# Altium PCB Signal_Integrity_2L.PcbDoc
Units mm, origin at the board's own origin, x right, y up, seen from the top; angles counter-clockwise.
Board outline 110 x 120 mm, 2 copper layers (Top Layer 1, Bottom Layer 1), stack 1.6 mm thick; 18 components, 16 nets, 78 pads, 1329 vias.
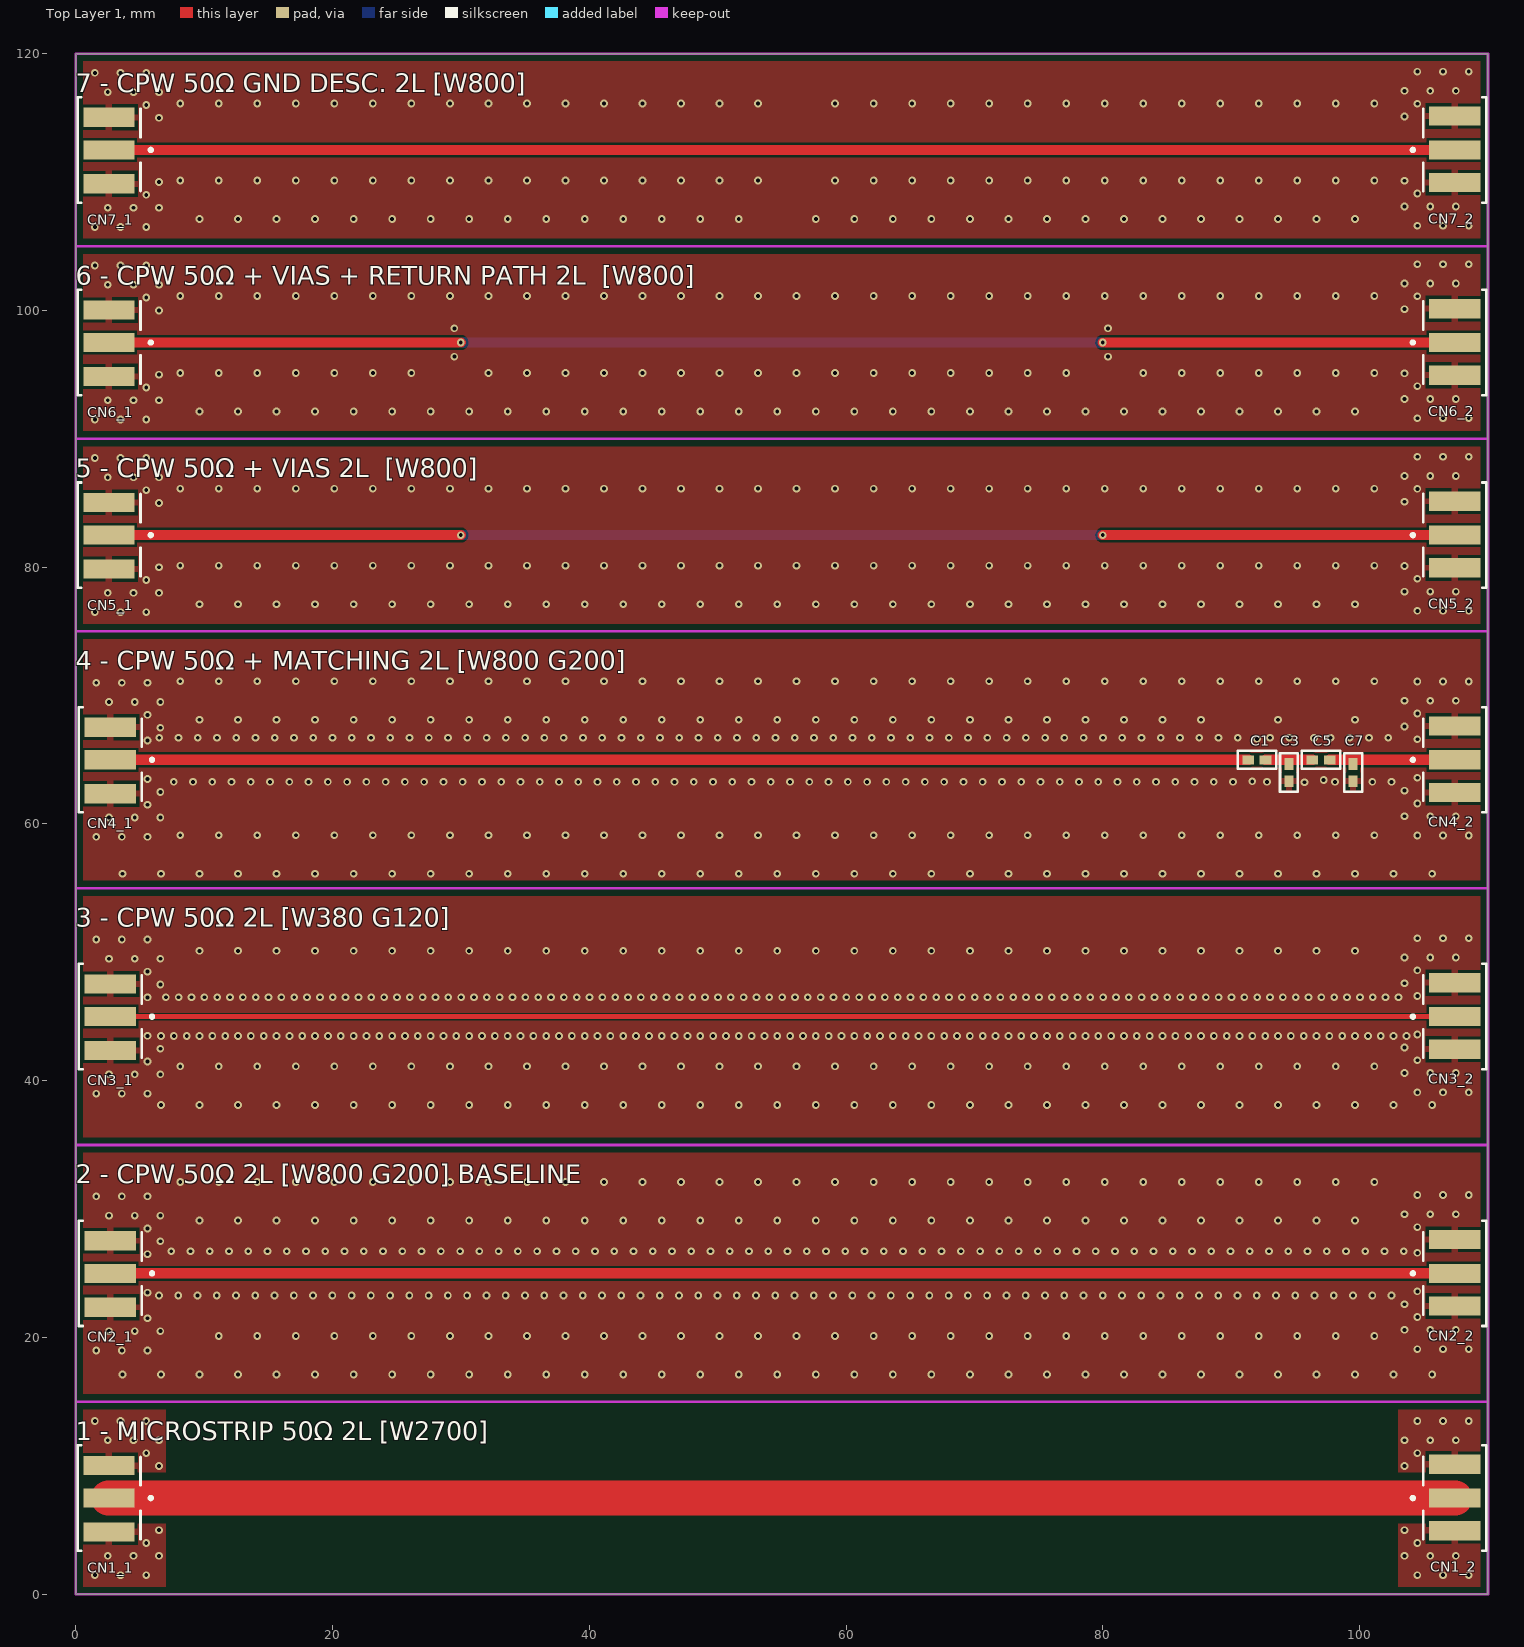
[diagram p0: Top Layer 1 view]
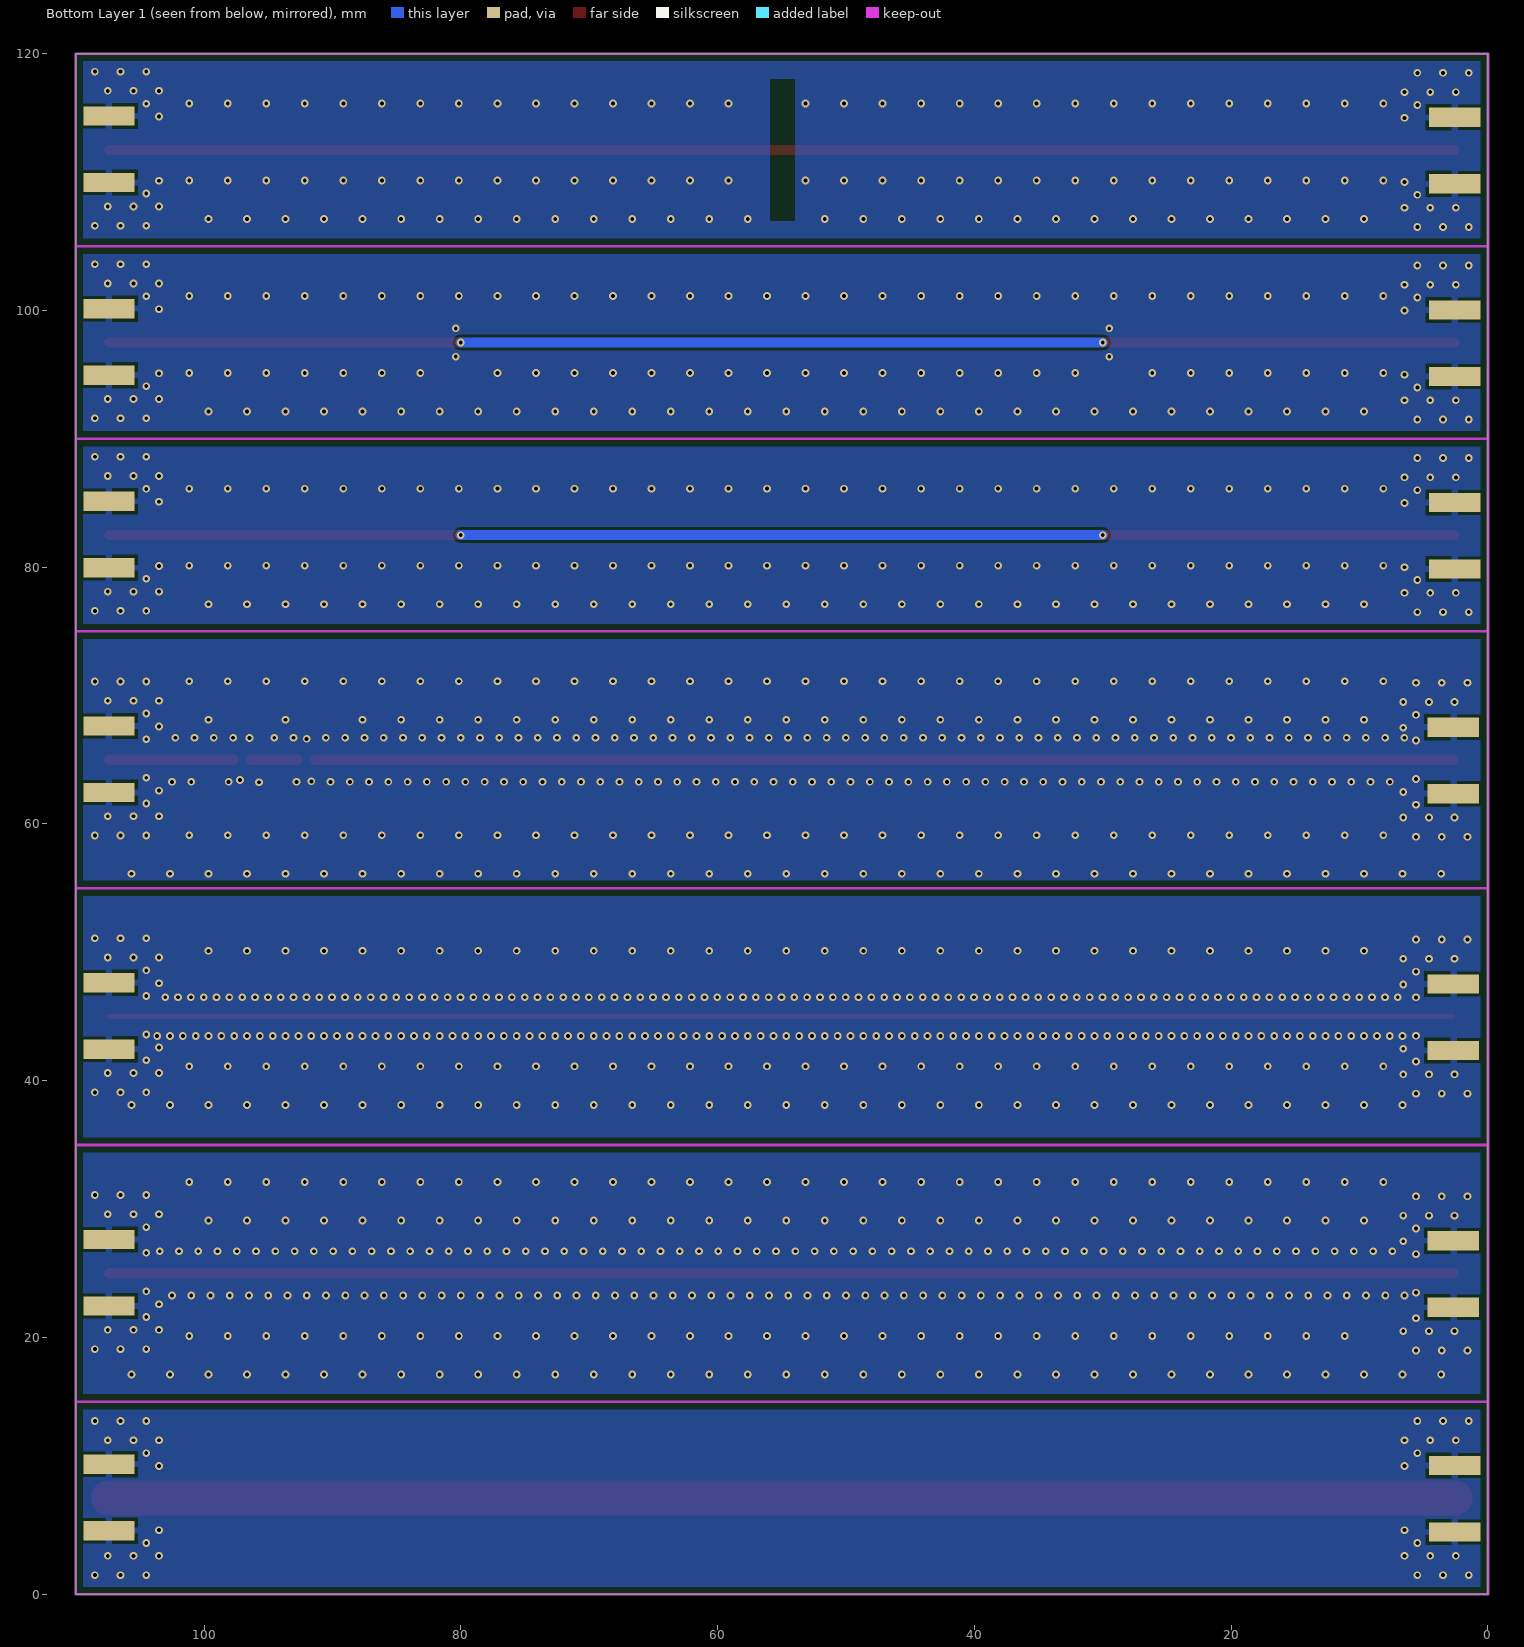
[diagram p1: Bottom Layer 1 view, seen from below]
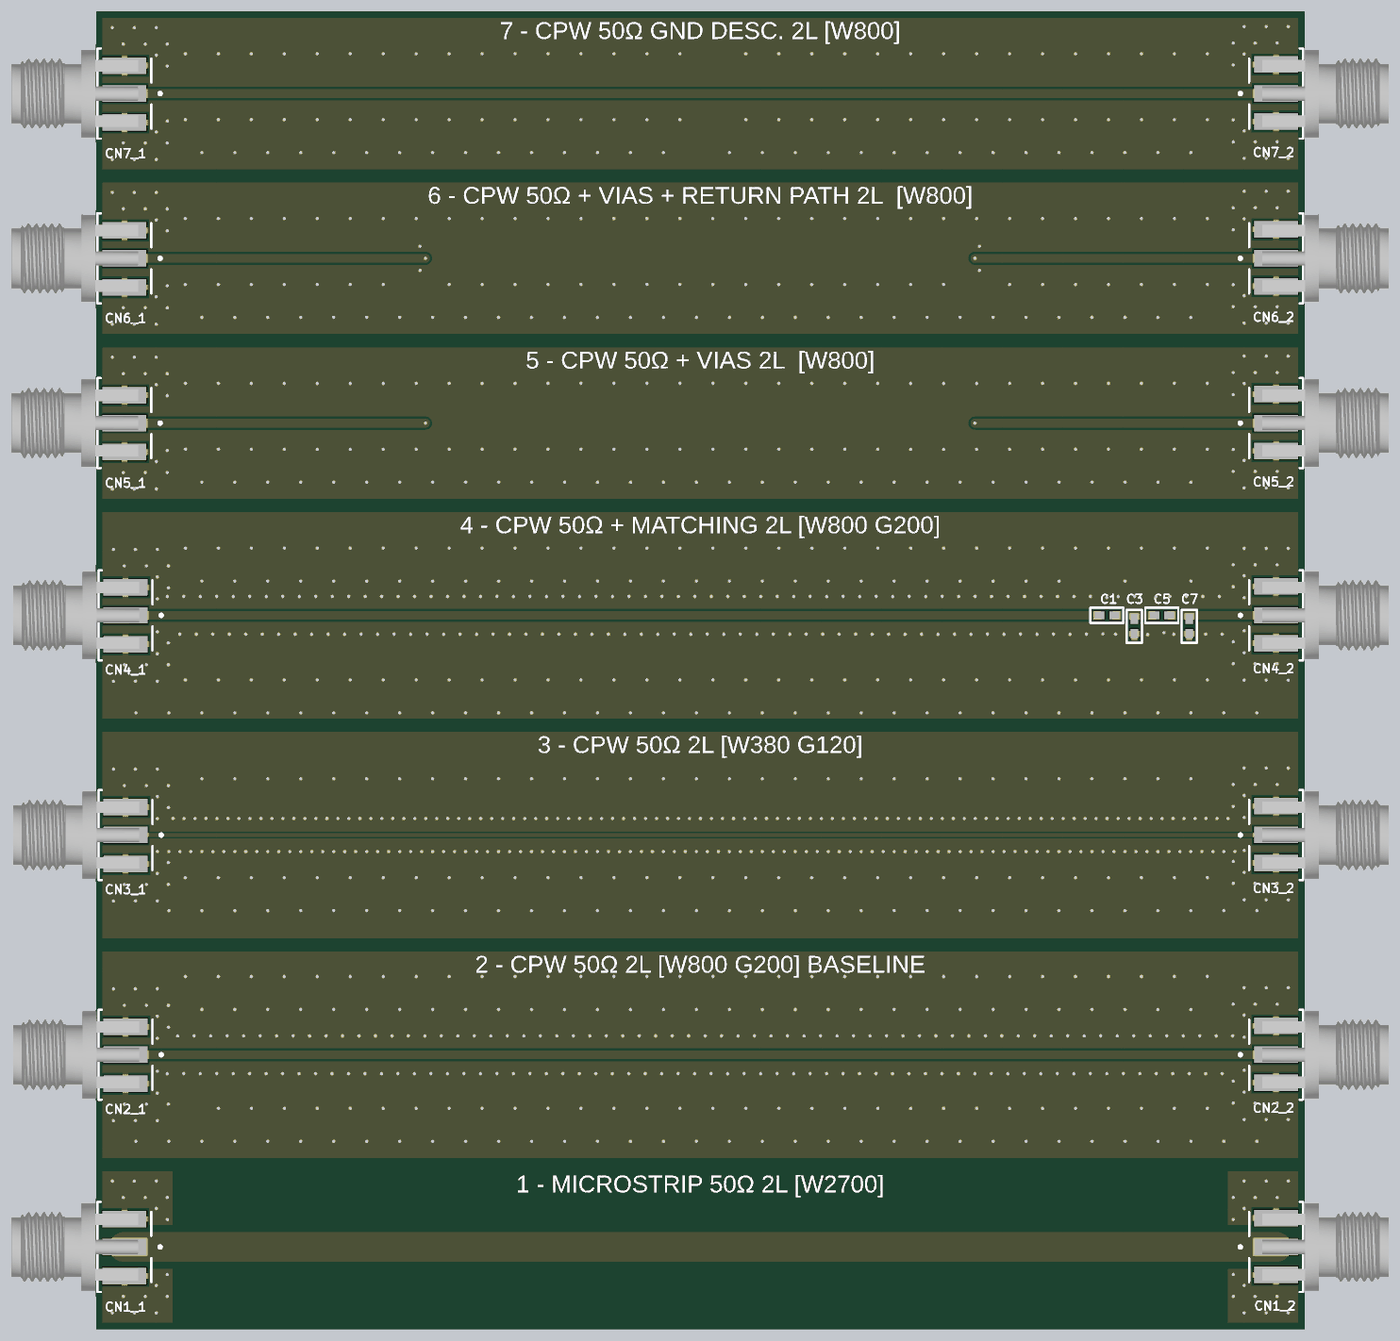
[diagram p2: 3D render of the assembled board from above, using the file's embedded part models]

## Layer stack, top to bottom
Top Solder: solder mask 0.0305, Solder Resist, Dk 3.8
Top Layer 1: signal copper 0.035
Dielectric 1: core 1.53, FR-4, Dk 4.6
Bottom Layer 1: signal copper 0.035
Bottom Solder: solder mask 0.0305, Solder Resist, Dk 3.8

## Board outline
0,0 0,120 110,120 110,0

## Design rules (kind name [scope] priority, off if disabled: settings)
Clearance Clearance_KO [OnLayer('Keep-Out Layer')] p1: gap=0.5 ignorepadtopadclearanceinfootprint=FALSE
Clearance Clearance_SC50_G120 [InNetClass('SC50_G120')] p2: gap=0.2 ignorepadtopadclearanceinfootprint=FALSE except(0.12: Arc-Fill Arc-Poly Arc-Region Track-Fill Track-Poly Track-Region)
Clearance Clearance_DP90 [InDifferentialPairClass('DP90') or InDifferentialPairClass('DPC90')] p3: gap=0.2 ignorepadtopadclearanceinfootprint=FALSE except(0.12: Arc-Arc Arc-Track Arc-Fill Arc-Poly Arc-Region Track-Track Track-Fill Track-Poly Track-Region)
Clearance [All] p4: gap=0.2 ignorepadtopadclearanceinfootprint=FALSE except(0.5: Fill-Fill Fill-Poly Fill-Region Poly-Poly Poly-Region Region-Region)
DiffPairsRouting DiffPairsRouting_DC90 [InDifferentialPairClass('DPC90')] p1: maxlimit=0.13 minlimit=0.13 mostfreqgap=0.13 toplayer_minwidth=0.19 toplayer_maxwidth=0.19 toplayer_prefwidth=0.19 bottomlayer_minwidth=0.19 bottomlayer_maxwidth=0.19 bottomlayer_prefwidth=0.19 impedanceprofiledriven=TRUE impedanceprofileid={4EF72ABD-D41F-48C9-AA84-232B5FCD5662} impedanceprofilevalue=90.000000 maxuncoupledlength=12.7
DiffPairsRouting DiffPairsRouting_DP90 [InDifferentialPairClass('DP90')] p2: maxlimit=0.13 minlimit=0.13 mostfreqgap=0.13 toplayer_minwidth=0.36 toplayer_maxwidth=0.36 toplayer_prefwidth=0.36 bottomlayer_minwidth=0.36 bottomlayer_maxwidth=0.36 bottomlayer_prefwidth=0.36 impedanceprofiledriven=TRUE impedanceprofileid={4D052417-7419-4060-914B-08419BBAABC2} impedanceprofilevalue=90.000000 maxuncoupledlength=12.7
Height [All] p1: minheight=0 maxheight=40 prefheight=12.7
HoleSize [All] p1: absolutevalues=TRUE maxlimit=5 minlimit=0.2 maxpercent=80.000 minpercent=20.000
MinimumSolderMaskSliver [All] p1: minsoldermaskwidth=0.12
PolygonConnect [All] p1: thpad.connectstyle=Relief thpad.reliefconductorwidth=0.254 thpad.reliefentries=4 thpad.polygonreliefangle="90 Angle" thpad.airgapwidth=0.254 smdpad.connectstyle=Relief smdpad.reliefconductorwidth=0.5 smdpad.reliefentries=4 smdpad.polygonreliefangle="90 Angle" smdpad.airgapwidth=0.254 via.connectstyle=Direct via.reliefconductorwidth=0.254 via.reliefentries=4 via.polygonreliefangle="90 Angle" via.airgapwidth=0.254
RoutingVias [All] p1: holewidth=0.3 width=0.6 viastyle="Through Hole" minholewidth=0.2 minwidth=0.6 maxholewidth=0.5 maxwidth=1
SilkToSilkClearance [All] p1: silktosilkclearance=0.127
SilkToSolderMaskClearance [IsPad] p1: minsilkscreentomaskgap=0.127 clearancetoexposedcopper=TRUE
SolderMaskExpansion SolderMaskExpansion_Tented [IsVia] p1: expansion=0.102 istentingtop=TRUE
SolderMaskExpansion [All] p2: expansion=0.102 istentingtop=FALSE
SupplyNets "Schematic Supply Nets_1" [InNet('GND5')] p1: voltage=0.000
SupplyNets "Schematic Supply Nets_11" [InNet('GND4')] p2: voltage=0.000
SupplyNets "Schematic Supply Nets_9" [InNet('GND1')] p3: voltage=0.000
SupplyNets "Schematic Supply Nets_8" [InNet('GND3')] p4: voltage=0.000
SupplyNets "Schematic Supply Nets_5" [InNet('GND2')] p5: voltage=0.000
SupplyNets "Schematic Supply Nets_4" [InNet('GND7')] p6: voltage=0.000
SupplyNets "Schematic Supply Nets" [InNet('GND6')] p7: voltage=0.000
Width Width_S50 [InNetClass('S50')] p1: maxlimit=2.7 minlimit=2.7 preferedwidth=2.7 impedanceprofiledriven=TRUE impedanceprofileid={85BB407E-ACC5-421C-8E24-185C8C1FA9EB} impedanceprofilevalue=50.000000 minimp=50.000000 maximp=50.000000 favimp=50.000000
Width Width_SC50_G200 [InNetClass('SC50')] p2: maxlimit=0.8 minlimit=0.8 preferedwidth=0.8 impedanceprofiledriven=TRUE impedanceprofileid={B37FB097-429D-4CF1-A0C8-09DB4BF85B47} impedanceprofilevalue=50.000000 minimp=50.000000 maximp=50.000000 favimp=50.000000
Width Width_SC50_G120 [InNetClass('SC50_G120')] p3: maxlimit=0.38 minlimit=0.38 preferedwidth=0.38 impedanceprofiledriven=TRUE impedanceprofileid={979D10FC-C7C2-44BE-B72E-80F3B42C48E9} impedanceprofilevalue=50.000000 minimp=50.000000 maximp=50.000000 favimp=50.000000
Width [All] p4: maxlimit=3 minlimit=0.2 preferedwidth=0.2 minimp=50.000000 maximp=50.000000 favimp=50.000000
24 further rules are at their usual default settings.

## Classes and differential pairs
net class SC50_G120: CPW_G120_50OHMS
net class S50: MICROSTRIP_50OHMS
net class SC50: CPW_50OHMS_GND_DESC CPW_50OHMS_VIAS CPW_50OHMS_VIAS_RP CPW_G200_50OHMS CPW_G200_50OHMS_MATCH NetC1_2 NetC5_2

## Components (designator, comment, footprint, x,y, rotation, side; value= is the part's Value field where it differs from the comment)
C1 "CAP SMD 0402" 0402 92,65 r0 top
C3 "CAP SMD 0402" 0402 94.5,64 r90 top
C5 "CAP SMD 0402" 0402 97,65 r0 top
C7 "CAP SMD 0402" 0402 99.5,64 r90 top
CN1_1 "SMA-KE EDGE" "SMA-KE EDGE" 2.6,7.5 r270 top
CN1_2 "SMA-KE EDGE" "SMA-KE EDGE" 107.4,7.5 r90 top
CN2_1 "SMA-KE EDGE" "SMA-KE EDGE" 2.7,25 r270 top
CN2_2 "SMA-KE EDGE" "SMA-KE EDGE" 107.4,25 r90 top
CN3_1 "SMA-KE EDGE" "SMA-KE EDGE" 2.7,45 r270 top
CN3_2 "SMA-KE EDGE" "SMA-KE EDGE" 107.4,45 r90 top
CN4_1 "SMA-KE EDGE" "SMA-KE EDGE" 2.7,65 r270 top
CN4_2 "SMA-KE EDGE" "SMA-KE EDGE" 107.4,65 r90 top
CN5_1 "SMA-KE EDGE" "SMA-KE EDGE" 2.6,82.5 r270 top
CN5_2 "SMA-KE EDGE" "SMA-KE EDGE" 107.4,82.5 r90 top
CN6_1 "SMA-KE EDGE" "SMA-KE EDGE" 2.6,97.5 r270 top
CN6_2 "SMA-KE EDGE" "SMA-KE EDGE" 107.4,97.5 r90 top
CN7_1 "SMA-KE EDGE" "SMA-KE EDGE" 2.6,112.5 r270 top
CN7_2 "SMA-KE EDGE" "SMA-KE EDGE" 107.4,112.5 r90 top

## Footprints (in the part's own frame and the unit in brackets; to place one, negate y for a bottom-side part, rotate by r counter-clockwise, add the part's x,y. Pads: shape width x height; smd on the part's side, far side on the other; paste and mask are expansions set on the pad)
0402 [mm]
  rect 0.9x0.7 smd: 1(-0.673,0) 2(0.673,0)
  silkscreen extent -1.5,-0.7 1.5,0.7
"SMA-KE EDGE" [mm]
  rect 1.5x4 smd: 1(0,0) 2(-2.54,0) 2(2.64,0)
  rect 1.5x4 smd far side: 2(-2.54,0) 2(2.64,0)
  silkscreen extent -4.1,-2.45 4.1,3.37, body extent -3.97,-10.25 3.97,1.26, height 4.61

## Part data
C1 C3 C5 C7: "0402"
CN1_1 CN1_2 CN2_1 CN2_2 CN3_1 CN3_2 CN4_1 CN4_2 CN5_1 CN5_2 CN6_1 CN6_2 CN7_1 CN7_2: "SMA Connector Receptacle, Female Socket 50Ohm Board Edge, End Launch Solder", Manufacturer_Name="TE Connectivity", Manufacturer_Part_Number=CONSMA020.062-G, Mouser Part Number=712-CONSMA020.062-G, Datasheet Link=https://componentsearchengine.com/Datasheets/1/CONSMA020.062-G.pdf, Geometry.Height=7.92mm, Mouser Price/Stock=https://www.mouser.co.uk/ProductDetail/Linx-Technologies/CONSMA020.062-G?qs=xZ%2FP%252Ba9zWqa7zEs9%2FuMaNQ%3D%3D

## Via types
v1: diameter 0.6, hole 0.3, Top Layer 1 to Bottom Layer 1, tented both sides, 1329 vias

## Nets (pads, with @x,y where several pads share a name; then routed paths per layer and width w, separated by ;. In a path a pad name is that pad's centre, name@x,y a point inside that pad or via, vN(x,y) a via of type N, cw(c..) or ccw(c..) an arc to the next point about the centre after c; other vN are vias at no path point)
CPW_50OHMS_GND_DESC: CN7_1.1 CN7_2.1 | length 104.8
  Top Layer 1 w0.8: CN7_1.1 CN7_2.1
CPW_50OHMS_VIAS: CN5_1.1 CN5_2.1 | length 104.8
  Top Layer 1 w0.8: CN5_1.1 v1(30,82.5) ; v1(80,82.5) CN5_2.1
  Bottom Layer 1 w0.8: v1(30,82.5) v1(80,82.5)
CPW_50OHMS_VIAS_RP: CN6_1.1 CN6_2.1 | length 104.8
  Top Layer 1 w0.8: CN6_1.1 v1(30,97.5) ; v1(80,97.5) CN6_2.1
  Bottom Layer 1 w0.8: v1(30,97.5) v1(80,97.5)
CPW_G120_50OHMS: CN3_1.1 CN3_2.1 | length 104.7
  Top Layer 1 w0.38: CN3_1.1 CN3_2.1
CPW_G200_50OHMS: CN2_1.1 CN2_2.1 | length 104.7
  Top Layer 1 w0.8: CN2_1.1 CN2_2.1
CPW_G200_50OHMS_MATCH: C1.1 CN4_1.1 | length 88.6
  Top Layer 1 w0.8: CN4_1.1 C1.1
GND1: CN1_1.2 CN1_2.2
  other v1: 1.5,1.5 3.5,1.5 5.5,1.5 104.5,1.5 106.5,1.5 108.5,1.5 2.5,3 4.5,3 6.5,3 103.5,3 105.5,3 107.5,3 5.5,4 104.5,4 6.5,5 103.5,5 6.5,10 103.5,10 5.5,11 104.5,11 2.5,12 4.5,12 6.5,12 103.5,12 105.5,12 107.5,12 1.5,13.5 3.5,13.5 5.5,13.5 104.5,13.5 106.5,13.5 108.5,13.5
GND2: CN2_1.2 CN2_2.2
  other v1: 3.65,17.121 6.65,17.121 9.65,17.121 12.65,17.121 15.65,17.121 18.65,17.121 21.65,17.121 24.65,17.121 27.65,17.121 30.65,17.121 33.65,17.121 36.65,17.121 39.65,17.121 42.65,17.121 45.65,17.121 48.65,17.121 51.65,17.121 54.65,17.121 57.65,17.121 60.65,17.121 63.65,17.121 66.65,17.121 69.65,17.121 72.65,17.121 75.65,17.121 78.65,17.121 81.65,17.121 84.65,17.121 87.65,17.121 90.65,17.121 93.65,17.121 96.65,17.121 99.65,17.121 102.65,17.121 105.65,17.121 1.6,19 3.6,19 5.6,19 104.5,19.1 106.5,19.1 108.5,19.1 11.15,20.121 14.15,20.121 17.15,20.121 20.15,20.121 23.15,20.121 26.15,20.121 29.15,20.121 32.15,20.121 35.15,20.121 38.15,20.121 41.15,20.121 44.15,20.121 47.15,20.121 50.15,20.121 53.15,20.121 56.15,20.121 59.15,20.121 62.15,20.121 65.15,20.121 68.15,20.121 71.15,20.121 74.15,20.121 77.15,20.121 80.15,20.121 83.15,20.121 86.15,20.121 89.15,20.121 92.15,20.121 95.15,20.121 98.15,20.121 101.15,20.121 2.6,20.5 4.6,20.5 6.6,20.5 103.5,20.6 105.5,20.6 107.5,20.6 5.6,21.5 104.5,21.6 103.5,22.6 6.494,23.281 7.994,23.281 9.494,23.281 10.994,23.281 12.494,23.281 13.994,23.281 15.494,23.281 16.994,23.281 18.494,23.281 19.994,23.281 21.494,23.281 22.994,23.281 24.494,23.281 25.994,23.281 27.494,23.281 28.994,23.281 30.494,23.281 31.994,23.281 33.494,23.281 34.994,23.281 36.494,23.281 37.994,23.281 39.494,23.281 40.994,23.281 42.494,23.281 43.994,23.281 45.494,23.281 46.994,23.281 48.494,23.281 49.994,23.281 51.494,23.281 52.994,23.281 54.494,23.281 55.994,23.281 57.494,23.281 58.994,23.281 60.494,23.281 61.994,23.281 63.494,23.281 64.994,23.281 66.494,23.281 67.994,23.281 69.494,23.281 70.994,23.281 72.494,23.281 73.994,23.281 75.494,23.281 76.994,23.281 78.494,23.281 79.994,23.281 81.494,23.281 82.994,23.281 84.494,23.281 85.994,23.281 87.494,23.281 88.994,23.281 90.494,23.281 91.994,23.281 93.494,23.281 94.994,23.281 96.494,23.281 97.994,23.281 99.494,23.281 100.994,23.281 102.494,23.281 5.6,23.5 104.5,23.6 5.6,26.5 104.5,26.6 7.445,26.719 8.945,26.719 10.445,26.719 11.945,26.719 13.445,26.719 14.945,26.719 16.445,26.719 17.945,26.719 19.445,26.719 20.945,26.719 22.445,26.719 23.945,26.719 25.445,26.719 26.945,26.719 28.445,26.719 29.945,26.719 31.445,26.719 32.945,26.719 34.445,26.719 35.945,26.719 37.445,26.719 38.945,26.719 40.445,26.719 41.945,26.719 43.445,26.719 44.945,26.719 46.445,26.719 47.945,26.719 49.445,26.719 50.945,26.719 52.445,26.719 53.945,26.719 55.445,26.719 56.945,26.719 58.445,26.719 59.945,26.719 61.445,26.719 62.945,26.719 64.445,26.719 65.945,26.719 67.445,26.719 68.945,26.719 70.445,26.719 71.945,26.719 73.445,26.719 74.945,26.719 76.445,26.719 77.945,26.719 79.445,26.719 80.945,26.719 82.445,26.719 83.945,26.719 85.445,26.719 86.945,26.719 88.445,26.719 89.945,26.719 91.445,26.719 92.945,26.719 94.445,26.719 95.945,26.719 97.445,26.719 98.945,26.719 100.445,26.719 101.945,26.719 103.445,26.719 6.6,27.5 5.6,28.5 104.5,28.6 9.65,29.121 12.65,29.121 15.65,29.121 18.65,29.121 21.65,29.121 24.65,29.121 27.65,29.121 30.65,29.121 33.65,29.121 36.65,29.121 39.65,29.121 42.65,29.121 45.65,29.121 48.65,29.121 51.65,29.121 54.65,29.121 57.65,29.121 60.65,29.121 63.65,29.121 66.65,29.121 69.65,29.121 72.65,29.121 75.65,29.121 78.65,29.121 81.65,29.121 84.65,29.121 87.65,29.121 90.65,29.121 93.65,29.121 96.65,29.121 99.65,29.121 2.6,29.5 4.6,29.5 6.6,29.5 103.5,29.6 105.5,29.6 107.5,29.6 1.6,31 3.6,31 5.6,31 104.5,31.1 106.5,31.1 108.5,31.1 8.15,32.121 11.15,32.121 14.15,32.121 17.15,32.121 20.15,32.121 23.15,32.121 26.15,32.121 29.15,32.121 32.15,32.121 35.15,32.121 38.15,32.121 41.15,32.121 44.15,32.121 47.15,32.121 50.15,32.121 53.15,32.121 56.15,32.121 59.15,32.121 62.15,32.121 65.15,32.121 68.15,32.121 71.15,32.121 74.15,32.121 77.15,32.121 80.15,32.121 83.15,32.121 86.15,32.121 89.15,32.121 92.15,32.121 95.15,32.121 98.15,32.121 101.15,32.121
GND3: CN3_1.2 CN3_2.2
  other v1: 6.65,38.121 9.65,38.121 12.65,38.121 15.65,38.121 18.65,38.121 21.65,38.121 24.65,38.121 27.65,38.121 30.65,38.121 33.65,38.121 36.65,38.121 39.65,38.121 42.65,38.121 45.65,38.121 48.65,38.121 51.65,38.121 54.65,38.121 57.65,38.121 60.65,38.121 63.65,38.121 66.65,38.121 69.65,38.121 72.65,38.121 75.65,38.121 78.65,38.121 81.65,38.121 84.65,38.121 87.65,38.121 90.65,38.121 93.65,38.121 96.65,38.121 99.65,38.121 102.65,38.121 105.65,38.121 1.6,39 3.6,39 5.6,39 104.5,39.1 106.5,39.1 108.5,39.1 2.6,40.5 4.6,40.5 6.6,40.5 103.5,40.6 105.5,40.6 107.5,40.6 8.15,41.121 11.15,41.121 14.15,41.121 17.15,41.121 20.15,41.121 23.15,41.121 26.15,41.121 29.15,41.121 32.15,41.121 35.15,41.121 38.15,41.121 41.15,41.121 44.15,41.121 47.15,41.121 50.15,41.121 53.15,41.121 56.15,41.121 59.15,41.121 62.15,41.121 65.15,41.121 68.15,41.121 71.15,41.121 74.15,41.121 77.15,41.121 80.15,41.121 83.15,41.121 86.15,41.121 89.15,41.121 92.15,41.121 95.15,41.121 98.15,41.121 101.15,41.121 5.6,41.5 104.5,41.6 6.6,42.5 103.5,42.6 5.6,43.5 6.65,43.495 7.65,43.495 8.65,43.495 9.65,43.495 10.65,43.495 11.65,43.495 12.65,43.495 13.65,43.495 14.65,43.495 15.65,43.495 16.65,43.495 17.65,43.495 18.65,43.495 19.65,43.495 20.65,43.495 21.65,43.495 22.65,43.495 23.65,43.495 24.65,43.495 25.65,43.495 26.65,43.495 27.65,43.495 28.65,43.495 29.65,43.495 30.65,43.495 31.65,43.495 32.65,43.495 33.65,43.495 34.65,43.495 35.65,43.495 36.65,43.495 37.65,43.495 38.65,43.495 39.65,43.495 40.65,43.495 41.65,43.495 42.65,43.495 43.65,43.495 44.65,43.495 45.65,43.495 46.65,43.495 47.65,43.495 48.65,43.495 49.65,43.495 50.65,43.495 51.65,43.495 52.65,43.495 53.65,43.495 54.65,43.495 55.65,43.495 56.65,43.495 57.65,43.495 58.65,43.495 59.65,43.495 60.65,43.495 61.65,43.495 62.65,43.495 63.65,43.495 64.65,43.495 65.65,43.495 66.65,43.495 67.65,43.495 68.65,43.495 69.65,43.495 70.65,43.495 71.65,43.495 72.65,43.495 73.65,43.495 74.65,43.495 75.65,43.495 76.65,43.495 77.65,43.495 78.65,43.495 79.65,43.495 80.649,43.495 81.649,43.495 82.649,43.495 83.649,43.495 84.649,43.495 85.649,43.495 86.649,43.495 87.649,43.495 88.649,43.495 89.649,43.495 90.649,43.495 91.649,43.495 92.649,43.495 93.649,43.495 94.649,43.495 95.649,43.495 96.649,43.495 97.649,43.495 98.649,43.495 99.649,43.495 100.649,43.495 101.649,43.495 102.649,43.495 103.649,43.495 104.5,43.6 5.6,46.5 7.025,46.505 8.025,46.505 9.025,46.505 10.025,46.505 11.025,46.505 12.025,46.505 13.025,46.505 14.025,46.505 15.025,46.505 16.025,46.505 17.025,46.505 18.025,46.505 19.025,46.505 20.025,46.505 21.025,46.505 22.025,46.505 23.025,46.505 24.025,46.505 25.025,46.505 26.025,46.505 27.025,46.505 28.025,46.505 29.025,46.505 30.025,46.505 31.025,46.505 32.025,46.505 33.025,46.505 34.025,46.505 35.025,46.505 36.025,46.505 37.025,46.505 38.025,46.505 39.025,46.505 40.025,46.505 41.025,46.505 42.025,46.505 43.025,46.505 44.025,46.505 45.025,46.505 46.025,46.505 47.025,46.505 48.025,46.505 49.025,46.505 50.025,46.505 51.025,46.505 52.025,46.505 53.025,46.505 54.025,46.505 55.025,46.505 56.025,46.505 57.025,46.505 58.025,46.505 59.025,46.505 60.025,46.505 61.025,46.505 62.025,46.505 63.025,46.505 64.025,46.505 65.025,46.505 66.025,46.505 67.025,46.505 68.025,46.505 69.025,46.505 70.025,46.505 71.025,46.505 72.025,46.505 73.025,46.505 74.025,46.505 75.025,46.505 76.025,46.505 77.025,46.505 78.025,46.505 79.025,46.505 80.025,46.505 81.025,46.505 82.025,46.505 83.025,46.505 84.025,46.505 85.025,46.505 86.025,46.505 87.025,46.505 88.025,46.505 89.025,46.505 90.025,46.505 91.025,46.505 92.025,46.505 93.025,46.505 94.025,46.505 95.025,46.505 96.025,46.505 97.025,46.505 98.025,46.505 99.025,46.505 100.025,46.505 101.025,46.505 102.025,46.505 103.025,46.505 104.5,46.6 6.6,47.5 103.5,47.6 5.6,48.5 104.5,48.6 2.6,49.5 4.6,49.5 6.6,49.5 103.5,49.6 105.5,49.6 107.5,49.6 9.65,50.121 12.65,50.121 15.65,50.121 18.65,50.121 21.65,50.121 24.65,50.121 27.65,50.121 30.65,50.121 33.65,50.121 36.65,50.121 39.65,50.121 42.65,50.121 45.65,50.121 48.65,50.121 51.65,50.121 54.65,50.121 57.65,50.121 60.65,50.121 63.65,50.121 66.65,50.121 69.65,50.121 72.65,50.121 75.65,50.121 78.65,50.121 81.65,50.121 84.65,50.121 87.65,50.121 90.65,50.121 93.65,50.121 96.65,50.121 99.65,50.121 1.6,51 3.6,51 5.6,51 104.5,51.1 106.5,51.1 108.5,51.1
GND4: C3.1 C7.1 CN4_1.2 CN4_2.2
  other v1: 3.65,56.121 6.65,56.121 9.65,56.121 12.65,56.121 15.65,56.121 18.65,56.121 21.65,56.121 24.65,56.121 27.65,56.121 30.65,56.121 33.65,56.121 36.65,56.121 39.65,56.121 42.65,56.121 45.65,56.121 48.65,56.121 51.65,56.121 54.65,56.121 57.65,56.121 60.65,56.121 63.65,56.121 66.65,56.121 69.65,56.121 72.65,56.121 75.65,56.121 78.65,56.121 81.65,56.121 84.65,56.121 87.65,56.121 90.65,56.121 93.65,56.121 96.65,56.121 99.65,56.121 102.65,56.121 105.65,56.121 1.6,59 3.6,59 5.6,59 104.5,59.1 106.5,59.1 108.5,59.1 8.15,59.121 11.15,59.121 14.15,59.121 17.15,59.121 20.15,59.121 23.15,59.121 26.15,59.121 29.15,59.121 32.15,59.121 35.15,59.121 38.15,59.121 41.15,59.121 44.15,59.121 47.15,59.121 50.15,59.121 53.15,59.121 56.15,59.121 59.15,59.121 62.15,59.121 65.15,59.121 68.15,59.121 71.15,59.121 74.15,59.121 77.15,59.121 80.15,59.121 83.15,59.121 86.15,59.121 89.15,59.121 92.15,59.121 95.15,59.121 98.15,59.121 101.15,59.121 2.6,60.5 4.6,60.5 6.6,60.5 103.5,60.6 105.5,60.6 107.5,60.6 5.6,61.5 104.5,61.6 6.6,62.5 103.5,62.6 95.712,63.246 7.644,63.281 9.144,63.281 10.644,63.281 12.144,63.281 13.644,63.281 15.144,63.281 16.644,63.281 18.144,63.281 19.644,63.281 21.144,63.281 22.644,63.281 24.144,63.281 25.644,63.281 27.144,63.281 28.644,63.281 30.144,63.281 31.644,63.281 33.144,63.281 34.644,63.281 36.144,63.281 37.644,63.281 39.144,63.281 40.644,63.281 42.144,63.281 43.644,63.281 45.144,63.281 46.644,63.281 48.144,63.281 49.644,63.281 51.144,63.281 52.644,63.281 54.144,63.281 55.644,63.281 57.144,63.281 58.644,63.281 60.144,63.281 61.644,63.281 63.144,63.281 64.644,63.281 66.144,63.281 67.644,63.281 69.144,63.281 70.644,63.281 72.144,63.281 73.644,63.281 75.144,63.281 76.644,63.281 78.144,63.281 79.644,63.281 81.144,63.281 82.644,63.281 84.144,63.281 85.644,63.281 87.144,63.281 88.644,63.281 90.144,63.281 92.796,63.281 98.086,63.281 100.994,63.281 102.494,63.281 91.643,63.318 97.202,63.419 5.6,63.5 104.5,63.6 5.6,66.5 104.5,66.6 92.007,66.631 96.454,66.702 6.51,66.719 8.01,66.719 9.51,66.719 11.01,66.719 12.51,66.719 14.01,66.719 15.51,66.719 17.01,66.719 18.51,66.719 20.01,66.719 21.51,66.719 23.01,66.719 24.51,66.719 26.01,66.719 27.51,66.719 29.01,66.719 30.51,66.719 32.01,66.719 33.51,66.719 35.01,66.719 36.51,66.719 38.01,66.719 39.51,66.719 41.01,66.719 42.51,66.719 44.01,66.719 45.51,66.719 47.01,66.719 48.51,66.719 50.01,66.719 51.51,66.719 53.01,66.719 54.51,66.719 56.01,66.719 57.51,66.719 59.01,66.719 60.51,66.719 62.01,66.719 63.51,66.719 65.01,66.719 66.51,66.719 68.01,66.719 69.51,66.719 71.01,66.719 72.51,66.719 74.01,66.719 75.51,66.719 77.01,66.719 78.51,66.719 80.01,66.719 81.51,66.719 83.01,66.719 84.51,66.719 86.01,66.719 87.51,66.719 89.01,66.719 90.51,66.719 93.03,66.719 94.53,66.719 97.735,66.719 99.235,66.719 100.735,66.719 102.235,66.719 6.6,67.5 103.5,67.6 9.65,68.121 12.65,68.121 15.65,68.121 18.65,68.121 21.65,68.121 24.65,68.121 27.65,68.121 30.65,68.121 33.65,68.121 36.65,68.121 39.65,68.121 42.65,68.121 45.65,68.121 48.65,68.121 51.65,68.121 54.65,68.121 57.65,68.121 60.65,68.121 63.65,68.121 66.65,68.121 69.65,68.121 72.65,68.121 75.65,68.121 78.65,68.121 81.65,68.121 84.65,68.121 87.65,68.121 93.65,68.121 99.65,68.121 5.6,68.5 104.5,68.6 2.6,69.5 4.6,69.5 6.6,69.5 103.5,69.6 105.5,69.6 107.5,69.6 1.6,71 3.6,71 5.6,71 8.15,71.121 11.15,71.121 14.15,71.121 17.15,71.121 20.15,71.121 23.15,71.121 26.15,71.121 29.15,71.121 32.15,71.121 35.15,71.121 38.15,71.121 41.15,71.121 44.15,71.121 47.15,71.121 50.15,71.121 53.15,71.121 56.15,71.121 59.15,71.121 62.15,71.121 65.15,71.121 68.15,71.121 71.15,71.121 74.15,71.121 77.15,71.121 80.15,71.121 83.15,71.121 86.15,71.121 89.15,71.121 92.15,71.121 95.15,71.121 98.15,71.121 101.15,71.121 104.5,71.1 106.5,71.1 108.5,71.1
GND5: CN5_1.2 CN5_2.2
  other v1: 1.5,76.5 3.5,76.5 5.5,76.5 104.5,76.6 106.5,76.6 108.5,76.6 9.65,77.121 12.65,77.121 15.65,77.121 18.65,77.121 21.65,77.121 24.65,77.121 27.65,77.121 30.65,77.121 33.65,77.121 36.65,77.121 39.65,77.121 42.65,77.121 45.65,77.121 48.65,77.121 51.65,77.121 54.65,77.121 57.65,77.121 60.65,77.121 63.65,77.121 66.65,77.121 69.65,77.121 72.65,77.121 75.65,77.121 78.65,77.121 81.65,77.121 84.65,77.121 87.65,77.121 90.65,77.121 93.65,77.121 96.65,77.121 99.65,77.121 2.5,78 4.5,78 6.5,78 103.5,78.1 105.5,78.1 107.5,78.1 5.5,79 104.5,79.1 6.5,80 103.5,80.1 8.15,80.121 11.15,80.121 14.15,80.121 17.15,80.121 20.15,80.121 23.15,80.121 26.15,80.121 29.15,80.121 32.15,80.121 35.15,80.121 38.15,80.121 41.15,80.121 44.15,80.121 47.15,80.121 50.15,80.121 53.15,80.121 56.15,80.121 59.15,80.121 62.15,80.121 65.15,80.121 68.15,80.121 71.15,80.121 74.15,80.121 77.15,80.121 80.15,80.121 83.15,80.121 86.15,80.121 89.15,80.121 92.15,80.121 95.15,80.121 98.15,80.121 101.15,80.121 6.5,85 103.5,85.1 5.5,86 104.5,86.1 8.15,86.121 11.15,86.121 14.15,86.121 17.15,86.121 20.15,86.121 23.15,86.121 26.15,86.121 29.15,86.121 32.15,86.121 35.15,86.121 38.15,86.121 41.15,86.121 44.15,86.121 47.15,86.121 50.15,86.121 53.15,86.121 56.15,86.121 59.15,86.121 62.15,86.121 65.15,86.121 68.15,86.121 71.15,86.121 74.15,86.121 77.15,86.121 80.15,86.121 83.15,86.121 86.15,86.121 89.15,86.121 92.15,86.121 95.15,86.121 98.15,86.121 101.15,86.121 2.5,87 4.5,87 6.5,87 103.5,87.1 105.5,87.1 107.5,87.1 1.5,88.5 3.5,88.5 5.5,88.5 104.5,88.6 106.5,88.6 108.5,88.6
GND6: CN6_1.2 CN6_2.2
  other v1: 1.5,91.5 3.5,91.5 5.5,91.5 104.5,91.6 106.5,91.6 108.5,91.6 9.65,92.121 12.65,92.121 15.65,92.121 18.65,92.121 21.65,92.121 24.65,92.121 27.65,92.121 30.65,92.121 33.65,92.121 36.65,92.121 39.65,92.121 42.65,92.121 45.65,92.121 48.65,92.121 51.65,92.121 54.65,92.121 57.65,92.121 60.65,92.121 63.65,92.121 66.65,92.121 69.65,92.121 72.65,92.121 75.65,92.121 78.65,92.121 81.65,92.121 84.65,92.121 87.65,92.121 90.65,92.121 93.65,92.121 96.65,92.121 99.65,92.121 2.5,93 4.5,93 6.5,93 103.5,93.1 105.5,93.1 107.5,93.1 5.5,94 104.5,94.1 6.5,95 8.15,95.121 11.15,95.121 14.15,95.121 17.15,95.121 20.15,95.121 23.15,95.121 26.15,95.121 32.15,95.121 35.15,95.121 38.15,95.121 41.15,95.121 44.15,95.121 47.15,95.121 50.15,95.121 53.15,95.121 56.15,95.121 59.15,95.121 62.15,95.121 65.15,95.121 68.15,95.121 71.15,95.121 74.15,95.121 77.15,95.121 83.15,95.121 86.15,95.121 89.15,95.121 92.15,95.121 95.15,95.121 98.15,95.121 101.15,95.121 103.5,95.1 29.5,96.4 80.4,96.4 29.5,98.6 80.4,98.6 6.5,100 103.5,100.1 5.5,101 104.5,101.1 8.15,101.121 11.15,101.121 14.15,101.121 17.15,101.121 20.15,101.121 23.15,101.121 26.15,101.121 29.15,101.121 32.15,101.121 35.15,101.121 38.15,101.121 41.15,101.121 44.15,101.121 47.15,101.121 50.15,101.121 53.15,101.121 56.15,101.121 59.15,101.121 62.15,101.121 65.15,101.121 68.15,101.121 71.15,101.121 74.15,101.121 77.15,101.121 80.15,101.121 83.15,101.121 86.15,101.121 89.15,101.121 92.15,101.121 95.15,101.121 98.15,101.121 101.15,101.121 2.5,102 4.5,102 6.5,102 103.5,102.1 105.5,102.1 107.5,102.1 1.5,103.5 3.5,103.5 5.5,103.5 104.5,103.6 106.5,103.6 108.5,103.6
GND7: CN7_1.2 CN7_2.2
  other v1: 1.5,106.5 3.5,106.5 5.5,106.5 104.5,106.6 106.5,106.6 108.5,106.6 9.65,107.121 12.65,107.121 15.65,107.121 18.65,107.121 21.65,107.121 24.65,107.121 27.65,107.121 30.65,107.121 33.65,107.121 36.65,107.121 39.65,107.121 42.65,107.121 45.65,107.121 48.65,107.121 51.65,107.121 57.65,107.121 60.65,107.121 63.65,107.121 66.65,107.121 69.65,107.121 72.65,107.121 75.65,107.121 78.65,107.121 81.65,107.121 84.65,107.121 87.65,107.121 90.65,107.121 93.65,107.121 96.65,107.121 99.65,107.121 2.5,108 4.5,108 6.5,108 103.5,108.1 105.5,108.1 107.5,108.1 5.5,109 104.5,109.1 6.5,110 103.5,110.1 8.15,110.121 11.15,110.121 14.15,110.121 17.15,110.121 20.15,110.121 23.15,110.121 26.15,110.121 29.15,110.121 32.15,110.121 35.15,110.121 38.15,110.121 41.15,110.121 44.15,110.121 47.15,110.121 50.15,110.121 53.15,110.121 59.15,110.121 62.15,110.121 65.15,110.121 68.15,110.121 71.15,110.121 74.15,110.121 77.15,110.121 80.15,110.121 83.15,110.121 86.15,110.121 89.15,110.121 92.15,110.121 95.15,110.121 98.15,110.121 101.15,110.121 6.5,115 103.5,115.1 5.5,116 104.5,116.1 8.15,116.121 11.15,116.121 14.15,116.121 17.15,116.121 20.15,116.121 23.15,116.121 26.15,116.121 29.15,116.121 32.15,116.121 35.15,116.121 38.15,116.121 41.15,116.121 44.15,116.121 47.15,116.121 50.15,116.121 53.15,116.121 59.15,116.121 62.15,116.121 65.15,116.121 68.15,116.121 71.15,116.121 74.15,116.121 77.15,116.121 80.15,116.121 83.15,116.121 86.15,116.121 89.15,116.121 92.15,116.121 95.15,116.121 98.15,116.121 101.15,116.121 2.5,117 4.5,117 6.5,117 103.5,117.1 105.5,117.1 107.5,117.1 1.5,118.5 3.5,118.5 5.5,118.5 104.5,118.6 106.5,118.6 108.5,118.6
MICROSTRIP_50OHMS: CN1_1.1 CN1_2.1 | length 104.9
  Top Layer 1 w2.7: CN1_1.1@2.55,7.5 CN1_1.1 CN1_2.1 CN1_2.1@107.45,7.5
NetC1_2: C1.2 C3.2 C5.1 | length 3.7
  Top Layer 1 w0.8: C1.2 C5.1
NetC5_2: C5.2 C7.2 CN4_2.1 | length 9.7
  Top Layer 1 w0.8: C5.2 CN4_2.1

## Polygon pours and split planes (outlines as drawn)
GND7 on Bottom Layer 1 "GND7_L02_P077" (solid, remove dead copper, pour order 77): 0,120 0,105 110,105 110,120
GND6 on Bottom Layer 1 "GND6_L02_P026" (solid, remove dead copper, pour order 26): 0,105 0,90 110,90 110,105
GND5 on Bottom Layer 1 "GND5_L02_P025" (solid, remove dead copper, pour order 25): 0,90 0,75 110,75 110,90
GND2 on Bottom Layer 1 "GND2_L02_P021" (solid, remove dead copper, pour order 21): 0,35 0,15 110,15 110,35
GND4 on Bottom Layer 1 "GND4_L02_P023" (solid, remove dead copper, pour order 23): 0,75 0,55 110,55 110,75
GND3 on Bottom Layer 1 "GND3_L02_P022" (solid, remove dead copper, pour order 22): 0,55 0,35 110,35 110,55
GND1 on Bottom Layer 1 "GND1_L02_P019" (solid, remove dead copper, pour order 19): 0,15 0,0 110,0 110,15
GND6 on Top Layer 1 "GND6_L01_P078" (solid, remove dead copper, pour order 78): 0,105 0,90 110,90 110,105
GND7 on Top Layer 1 "GND7_L01_P027" (solid, remove dead copper, pour order 27): 0,120 0,105 110,105 110,120
GND5 on Top Layer 1 "GND5_L01_P079" (solid, remove dead copper, pour order 79): 0,90 0,75 110,75 110,90
GND4 on Top Layer 1 "GND4_L01_P034" (solid, remove dead copper, pour order 34): 0,75 0,55 110,55 110,75
GND3 on Top Layer 1 "GND3_L01_P033" (solid, remove dead copper, pour order 33): 0,55 0,35 110,35 110,55
GND2 on Top Layer 1 "GND2_L01_P020" (solid, remove dead copper, pour order 20): 0,35 0,15 110,15 110,35
GND1 on Top Layer 1 "GND1_L01_P043" (solid, remove dead copper, pour order 43): 110,0 103,0 103,5.5 110,5.5
GND1 on Top Layer 1 "GND1_L01_P042" (solid, remove dead copper, pour order 42): 110,15 103,15 103,9.5 110,9.5
GND1 on Top Layer 1 "GND1_L01_P041" (solid, remove dead copper, pour order 41): 0,0 7,0 7,5.5 0,5.5
GND1 on Top Layer 1 "GND1_L01_P040" (solid, remove dead copper, pour order 40): 0,15 7,15 7,9.5 0,9.5

## Keep-outs
Keep-Out Layer:
  lines w0.2: 0,15 110,15 ; 0,35 110,35 ; 0,55 110,55 ; 0,75 110,75 ; 0,90 110,90 ; 0,105 110,105 ; 0,0 0,120 110,120 110,0 0,0

## Other copper
Bottom Layer 1:
  pour cut-out: 54,118 54,107 55.9,107 55.9,118

## Silkscreen, mask and mechanical layers (free items; w line width, h text height)
Top Overlay:
  text "7 - CPW 50Ω GND DESC. 2L [W800]" at 0,116.5 h2.5
  text "6 - CPW 50Ω + VIAS + RETURN PATH 2L  [W800]" at 0,101.5 h2.5
  text "5 - CPW 50Ω + VIAS 2L  [W800]" at 0,86.5 h2.5
  text "4 - CPW 50Ω + MATCHING 2L [W800 G200]" at 0,71.5 h2.5
  text "3 - CPW 50Ω 2L [W380 G120]" at 0,51.5 h2.5
  text "2 - CPW 50Ω 2L [W800 G200] BASELINE" at 0,31.5 h2.5
  text "1 - MICROSTRIP 50Ω 2L [W2700]" at 0,11.5 h2.5
Referencias:
  circle w0.254: c78.5,65.5 r3
  circle w0.254: c9.5,65.5 r5
  circle w0.254: c78.5,9.5 r5
  circle w0.254: c9.5,9.5 r5
  circle w0.254: c78.5,65.5 r5
  circle w0.254: c9.5,65.5 r3
  circle w0.254: c9.5,9.5 r3
  circle w0.254: c78.5,9.5 r3
  lines w0.1: 83.3,7 83.3,68.091 ; 3,16 ccw(c15.988,15.988) 15.976,3 74.024,3 ccw(c74.012,15.988) 87,16 87,59 ccw(c74.012,59.012) 74.024,72 15.976,72 ccw(c15.988,59.012) 3,59 3,16

## Dimensions
0,120 to 0,0 on Dimensions
0,0 to 110,0 on Dimensions